# Altium PCB LEDFLX.PcbDoc (part 2 of 2)
Units mil, origin at the board's own origin, x right, y up, seen from the top; angles counter-clockwise.
Board outline 11984.7 x 6871.18 mil, 2 copper layers (Top Layer, Bottom Layer); 47 components, 41 nets, 211 pads, 221 vias.
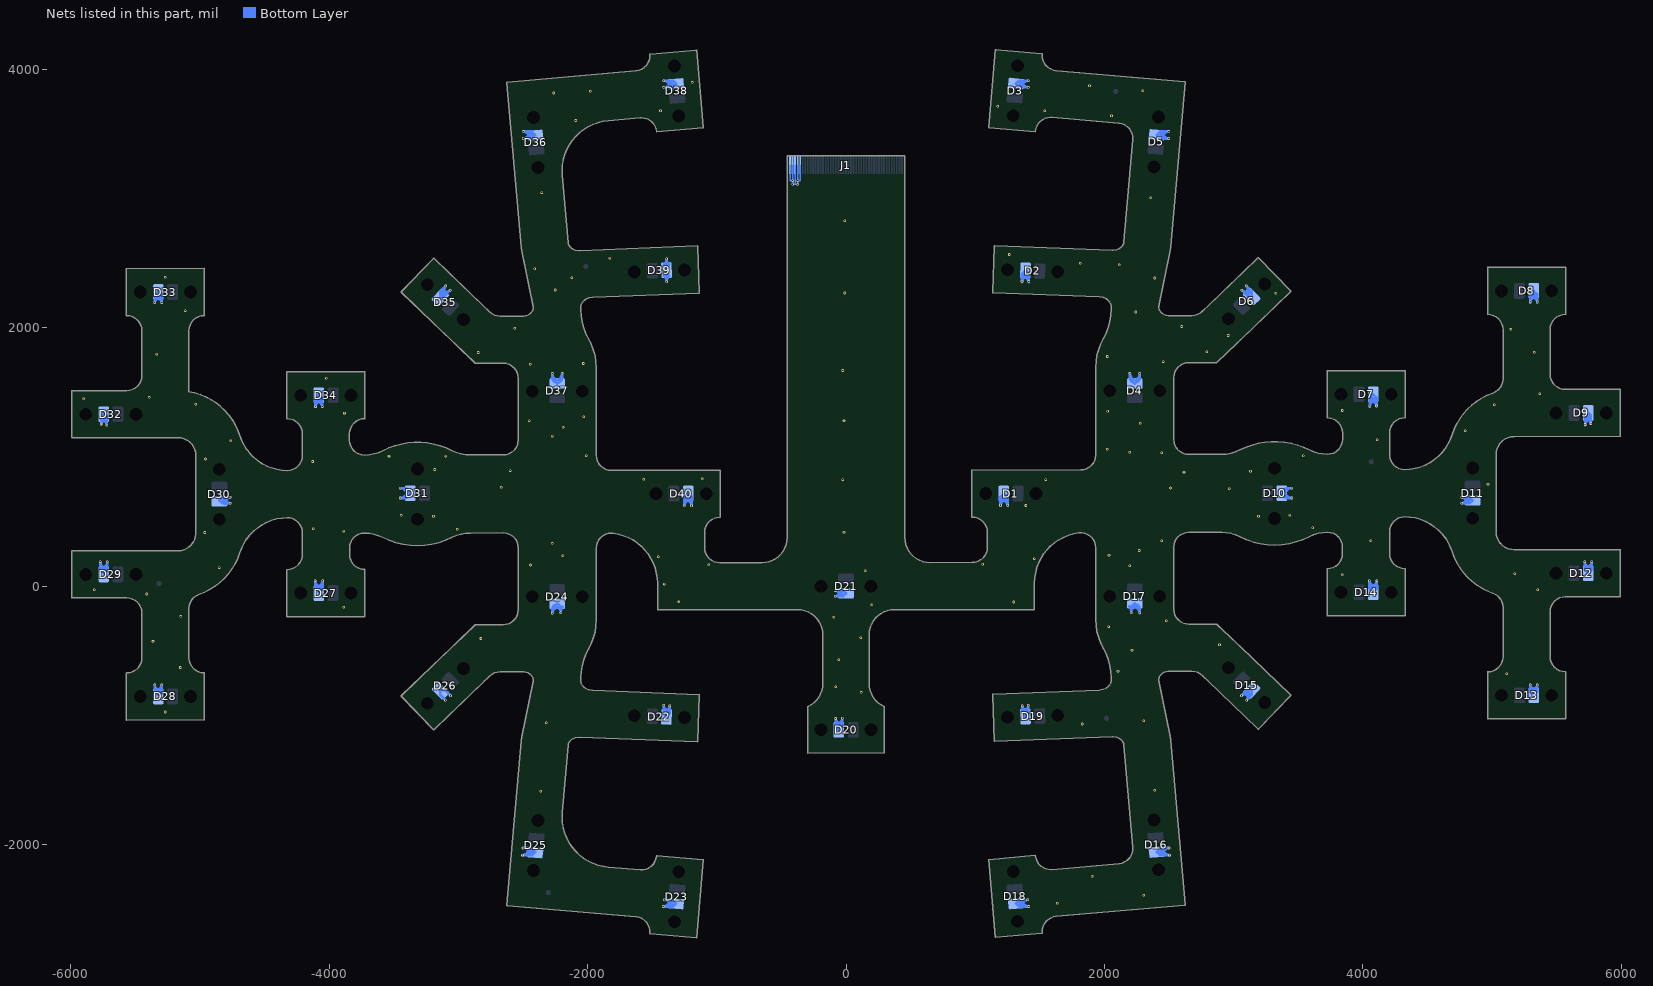
[diagram p2: the nets of this part, all layers, seen from the top]

## Via types
v1: diameter 20, hole 10, Top Layer to Bottom Layer, 221 vias

## Nets (pads, with @x,y where several pads share a name; then routed paths per layer and width w, separated by ;. In a path a pad name is that pad's centre, name@x,y a point inside that pad or via, vN(x,y) a via of type N, cw(c..) or ccw(c..) an arc to the next point about the centre after c; other vN are vias at no path point) (continued)
VCC: D1.1 D2.1 D3.1 D4.1 D5.1 D6.1 D7.1 D8.1 D9.1 D10.1 D11.1 D12.1 D13.1 D14.1 D15.1 D16.1 D17.1 D18.1 D19.1 D20.1 D21.1 D22.1 D23.1 D24.1 D25.1 D26.1 D27.1 D28.1 D29.1 D30.1 D31.1 D32.1 D33.1 D34.1 D35.1 D36.1 D37.1 D38.1 D39.1 D40.1 J1.41 J1.42 J1.43 J1.44 J1.45 | length 21223.7
  Bottom Layer w12: J1.45@-433.07,3258.66 -433.07,3139.05 -432.6,3138.59 -413.07,3138.59 -413.07,3111.65 -393.7,3111.65 ; v1(-413.39,3138.9) J1.44@-413.39,3258.66 ; J1.43@-393.7,3258.66 -393.7,3111.65 ; v1(-374.02,3138.9) J1.42@-374.02,3258.66 ; J1.41@-354.41,3258.66 -354.33,3138.07 -373.19,3138.07 -373.19,3111.65 -393.7,3111.65 ; -423.8,3138.59 ccw(c-423.8,3149.31) v1@-416.21,3141.73 ; -423.8,3138.59 ccw(c-423.8,3149.31) v1@-416.21,3141.73 ; -423.8,3138.59 ccw(c-423.8,3149.31) v1@-416.21,3141.73 ; v1@-416.21,3136.07 cw(c-423.8,3128.49) -413.07,3128.49 ; v1@-416.21,3136.07 cw(c-423.8,3128.49) -413.07,3128.49 ; v1@-416.21,3136.07 cw(c-423.8,3128.49) -413.07,3128.49 ; v1@-416.14,3113.26 ccw(c-423.53,3120.66) -413.07,3120.66 ; v1@-416.14,3113.26 ccw(c-423.53,3120.66) -413.07,3120.66 ; v1@-416.14,3113.26 ccw(c-423.53,3120.66) -413.07,3120.66 ; v1@-410.48,3107.6 cw(c-400.71,3097.83) -400.71,3111.65 ; v1@-410.48,3107.6 cw(c-400.71,3097.83) -400.71,3111.65 ; v1@-410.48,3107.6 cw(c-400.71,3097.83) -400.71,3111.65 ; -386.54,3111.65 cw(c-386.54,3097.83) v1@-376.77,3107.6 ; -386.54,3111.65 cw(c-386.54,3097.83) v1@-376.77,3107.6 ; -386.54,3111.65 cw(c-386.54,3097.83) v1@-376.77,3107.6 ; v1@-376.84,3136.07 cw(c-385.67,3127.24) -373.19,3127.24 ; v1@-376.84,3136.07 cw(c-385.67,3127.24) -373.19,3127.24 ; v1@-376.84,3136.07 cw(c-385.67,3127.24) -373.19,3127.24 ; v1@-376.77,3113.26 ccw(c-385.4,3121.9) -373.19,3121.9 ; v1@-376.77,3113.26 ccw(c-385.4,3121.9) -373.19,3121.9 ; v1@-376.77,3113.26 ccw(c-385.4,3121.9) -373.19,3121.9 ; v1@-371.19,3141.73 ccw(c-362.36,3150.55) -362.36,3138.07 ; v1@-371.19,3141.73 ccw(c-362.36,3150.55) -362.36,3138.07 ; v1@-371.19,3141.73 ccw(c-362.36,3150.55) -362.36,3138.07
  Bottom Layer w20: -5772.64,163 ccw(c-5729.45,163) D29.1@-5741.98,121.67 ; v1(-5765.75,1255.01) cw(c-5740.9,1255.01) D32.1@-5742.85,1279.78 ; v1@-5765.75,1258.86 -5765.75,1319.92 -5745.32,1340.35 -5720.47,1315.51 v1@-5720.47,1250.98 ; D29.1@-5753.86,140.99 ccw(c-5767.38,188.97) v1(-5717.52,188.98) -5717.52,128.27 -5745.32,100.47 -5772.64,127.8 v1(-5772.64,189.96) ccw(c-5721.28,189.96) D29.1@-5736.18,140.81 ; D32.1@-5749.85,1280.01 cw(c-5754.78,1246.06) v1(-5720.47,1246.06) ; D29.1@-5748.43,121.73 ccw(c-5759.94,162.56) -5717.52,162.56 ; D32.1@-5746.97,1299.8 cw(c-5751.42,1269.18) -5720.47,1269.18 ; -5351.38,-787.92 ccw(c-5315.97,-787.92) D28.1@-5321.12,-822.96 ; v1(-5351.38,2193.05) cw(c-5318.92,2193.05) D33.1@-5320.88,2225.45 ; v1@-5351.38,2199.8 -5351.38,2256.77 -5322.8,2285.35 -5296.26,2258.82 v1@-5296.26,2200.79 ; -5351.38,2214.3 cw(c-5320.21,2214.3) D33.1@-5322.1,2245.41 ; D28.1@-5328.96,-803.44 ccw(c-5336.69,-764.77) v1(-5297.24,-764.76) -5297.24,-819.68 -5322.8,-845.24 -5351.38,-816.65 v1(-5351.38,-764.76) ccw(c-5312.56,-764.77) D28.1@-5318.21,-803.17 ; D28.1@-5325.05,-823.06 ccw(c-5331.82,-789.15) -5297.24,-789.15 ; D33.1@-5324.91,2225.46 cw(c-5326.96,2194.83) v1(-5296.26,2194.83) ; D33.1@-5323.57,2245.42 cw(c-5325.53,2216.22) D33.1@-5296.26,2216.22 ; D30.1@-4819.02,656.38 cw(c-4787.98,655.97) -4787.98,687.01 ; D30.1@-4808.24,634.26 cw(c-4790.21,616.24) D30.1@-4790.21,641.73 ; D30.1@-4800.57,666.29 ccw(c-4766.73,677.31) v1(-4766.73,641.73) -4827.32,641.73 -4850.2,664.61 -4827.8,687.01 v1(-4767.72,687.01) ccw(c-4767.72,655.7) D30.1@-4799.02,656.12 ; -4109.25,17.7 ccw(c-4067.61,17.7) D27.1@-4077.69,-22.7 ; v1(-4106.3,1389.66) cw(c-4067.79,1389.66) D34.1@-4074.77,1427.53 ; v1@-4106.3,1394.69 -4106.3,1459.09 -4080.47,1484.92 -4054.13,1458.58 v1@-4054.13,1393.7 ; -4106.3,1413.68 cw(c-4072.22,1413.68) D34.1@-4078.39,1447.2 ; D27.1@-4087.46,-3.15 ccw(c-4097.81,42.32) v1(-4051.18,42.32) -4051.18,-17.56 -4080.47,-46.85 -4109.25,-18.07 v1(-4109.25,43.31) ccw(c-4061.22,43.3) D27.1@-4072.85,-3.3 ; D34.1@-4086.39,1427.57 cw(c-4093.86,1388.55) v1@-4054.13,1388.55 ; D27.1@-4083.02,-22.65 ccw(c-4092.11,17.26) -4051.18,17.26 ; D34.1@-4082.63,1447.21 cw(c-4089.23,1412.74) -4054.13,1412.74 ; -3420.79,758.86 cw(c-3420.79,717.98) D31.1@-3383.05,733.69 ; -3418.24,682.09 ccw(c-3418.24,721.93) D31.1@-3382.7,703.93 ; D31.1@-3401.52,726 ccw(c-3450.79,705.49) v1(-3450.79,758.86) -3412.87,758.86 D31.1@-3372.44,718.43 -3408.78,682.09 v1(-3450.79,682.09) ccw(c-3450.78,738.4) D31.1@-3400.54,712.97 ; D35.1@-3122.11,2261.37 ccw(c-3109.48,2292.95) -3085.43,2268.9 ; D35.1@-3117.2,2257.61 cw(c-3086.73,2280.57) -3113.71,2307.55 ; D35.1@-3114.69,2279.94 ccw(c-3097.23,2323.61) v1(-3063.98,2290.35) -3112.67,2241.66 -3140.02,2241.66 -3140.02,2281.24 v1(-3097.44,2323.82) ccw(c-3068.18,2294.56) D35.1@-3101.23,2269.65 ; v1@-3100.39,-882.87 -3100.39,-881.89 -3140.02,-842.27 -3140.02,-805.16 -3103.3,-805.16 v1(-3061.02,-847.44) ; -2477.06,-2026.57 cw(c-2477.06,-2067.15) D25.1@-2436.86,-2061.63 ; -2475.28,3519.69 cw(c-2475.28,3480.96) D36.1@-2436.87,3485.92 ; -2474.39,-2081.69 ccw(c-2474.39,-2040.5) D25.1@-2436.14,-2055.8 ; -2471.31,3464.57 ccw(c-2471.31,3500.85) D36.1@-2436.5,3490.63 ; D36.1@-2456.71,3483.35 ccw(c-2498.03,3478.02) v1(-2498.03,3519.69) -2432.44,3519.69 -2405.86,3493.1 -2434.39,3464.57 v1(-2498.03,3464.57) ccw(c-2498.03,3508.69) D36.1@-2455.69,3496.26 ; D25.1@-2456.67,-2064.35 ccw(c-2500,-2070.31) v1(-2500,-2026.57) -2437.03,-2026.57 -2405.86,-2057.75 -2429.8,-2081.69 v1(-2503.94,-2081.69) ccw(c-2503.93,-2028.68) D25.1@-2454.71,-2048.37 ; D25.1@-2454.12,-2026.57 cw(c-2454.12,-2064) D25.1@-2417.05,-2058.91 ; D36.1@-2452.53,3519.69 cw(c-2452.53,3483.89) D36.1@-2417.04,3488.48 ; -2273.62,1615.66 ccw(c-2232.89,1615.66) D37.1@-2249.67,1578.55 ; v1(-2273.62,1646.65) ccw(c-2218.88,1646.65) D37.1@-2241.43,1596.77 ; v1(-2273.62,1646.65) -2273.62,1606.97 D37.1@-2234.72,1568.07 -2197.83,1604.96 v1(-2197.83,1646.65) ; v1(-2272.64,-209.03) cw(c-2226.72,-209.03) D24.1@-2243.14,-166.14 ; v1@-2272.64,-206.69 -2272.64,-170.94 -2234.72,-133.03 -2206.69,-161.06 v1(-2206.69,-205.71) ; -2272.64,-179.95 cw(c-2237.86,-179.95) D24.1@-2250.3,-147.47 ; D24.1@-2230.95,-163.92 cw(c-2255.69,-206.21) v1@-2206.69,-206.21 ; D37.1@-2229.05,1596.28 ccw(c-2254.08,1646.65) v1(-2197.83,1646.65) ; D37.1@-2220.15,1578.37 ccw(c-2238.05,1614.38) -2197.83,1614.38 ; -2206.69,-192.62 cw(c-2159.15,-192.62) D24.1@-2192.77,-159 ; -1411.42,-947.15 ccw(c-1376.27,-947.15) D22.1@-1385.15,-981.16 ; D39.1@-1409.64,2403.45 cw(c-1454.97,2355.27) v1@-1388.82,2355.27 ; D39.1@-1409.45,2490.17 ccw(c-1444.65,2533.5) v1(-1388.82,2533.51) ; D22.1@-1393.57,-961.28 ccw(c-1399.82,-926.18) v1(-1364.17,-926.18) -1364.17,-984.91 -1388.82,-1009.56 -1411.42,-986.96 v1(-1411.42,-921.26) ccw(c-1369.51,-921.26) D22.1@-1380.09,-961.81 ; D22.1@-1390.07,-980.97 ccw(c-1395.57,-950.06) -1364.17,-950.06 ; v1(-1388.78,2355.31) v1@-1388.82,2355.27 ; -1385.88,-2479.33 ccw(c-1385.88,-2436.77) D23.1@-1346.33,-2452.49 ; -1385.3,3912.4 cw(c-1385.3,3872.46) D38.1@-1346.74,3882.87 ; -1384.89,3860.24 ccw(c-1384.89,3899.96) D38.1@-1346.7,3889.03 ; -1383.95,-2427.17 cw(c-1383.95,-2464.61) D23.1@-1346.99,-2458.58 ; D39.1@-1368.83,2489.41 cw(c-1330.2,2533.5) v1(-1388.82,2533.51) ; D39.1@-1367.31,2402.68 ccw(c-1325.82,2355.27) v1@-1388.82,2355.27 ; D23.1@-1366.73,-2461.8 ccw(c-1407.48,-2468.45) v1(-1407.48,-2427.17) -1345.11,-2427.17 -1316.03,-2456.25 -1339.12,-2479.33 v1(-1415.35,-2479.33) ccw(c-1415.35,-2425.06) D23.1@-1364.91,-2445.1 ; D38.1@-1366.05,3877.66 ccw(c-1411.41,3865.42) v1(-1411.41,3912.4) -1338.65,3912.4 -1316.03,3889.79 -1345.59,3860.24 v1(-1411.41,3860.24) ccw(c-1411.41,3907.55) D38.1@-1365.92,3894.53 ; v1@-1250.98,626.97 -1250.98,687.05 D40.1@-1221.3,716.73 -1195.87,691.3 v1@-1195.87,626.97 ; D21.1@-60.02,-77.76 ccw(c-60.02,-48.35) D21.1@-31.02,-53.22 ; D21.1@-58.52,-34.45 cw(c-58.52,-62.48) D21.1@-30.98,-57.26 ; D21.1@-50.75,-49.91 cw(c-83.66,-44.38) v1(-83.66,-77.76) -22.64,-77.76 D21.1@0,-55.12 -20.67,-34.45 v1(-82.68,-34.45) cw(c-82.67,-67.07) D21.1@-50.63,-60.99 ; v1(1195.87,626.97) 1195.87,691.3 D1.1@1221.3,716.73 1250.98,687.05 v1(1250.98,626.97) ; v1@1362.2,2354.26 cw(c1401.34,2354.26) D2.1@1393.98,2392.69 ; v1(1362.2,2359.25) 1362.2,2416.68 D2.1@1388.82,2443.3 1413.39,2418.73 v1(1413.39,2358.27) ; 1362.2,2378.45 cw(c1396.7,2378.45) D2.1@1390.21,2412.34 ; D2.1@1381.54,2392.81 cw(c1373.24,2353.53) v1@1413.39,2353.53 ; D2.1@1385.68,2412.38 cw(c1378.45,2378.2) 1413.39,2378.2 ; v1(2197.83,1646.65) 2197.83,1604.96 D4.1@2234.72,1568.07 2273.62,1606.97 v1(2273.62,1646.65) ; v1(2206.69,-205.71) 2206.69,-161.06 D17.1@2234.72,-133.03 2272.64,-170.94 v1(2272.64,-206.69) ; v1(3100.39,-882.87) v1@3100.39,-881.89 ; v1(4054.13,1393.7) 4054.13,1458.58 D7.1@4080.47,1484.92 4106.3,1459.09 v1(4106.3,1394.69) ; v1(5296.26,2200.79) 5296.26,2258.82 D8.1@5322.8,2285.35 5351.38,2256.77 v1(5351.38,2199.8) ; v1(5720.47,1250.98) 5720.47,1315.51 D9.1@5745.32,1340.35 5765.75,1319.92 v1(5765.75,1258.86) ; v1@-1388.82,2355.27 v1(-1388.82,2533.51) ; v1(-80.71,-1024.61) ccw(c-43.78,-1024.61) -49.9,-1061.03 cw(c-43.78,-1024.61) v1(-80.71,-1024.61) ; v1(-80.71,-1024.61) -80.71,-1086.18 D20.1@-55.12,-1111.77 -27.56,-1084.21 v1(-27.56,-1023.62) ; v1@-27.56,-1023.62 cw(c-65.28,-1023.62) -59.74,-1060.93 ccw(c-65.28,-1023.62) v1@-27.56,-1023.62 ; v1(1364.17,-926.18) ccw(c1397.01,-926.18) 1392.44,-958.7 cw(c1397.01,-926.18) v1(1364.17,-926.18) ; v1(1364.17,-926.18) 1364.17,-984.91 D19.1@1388.82,-1009.56 1411.42,-986.96 v1(1411.42,-921.26) ; v1(1407.48,-2427.17) ccw(c1407.48,-2468.93) 1366.52,-2460.72 cw(c1407.48,-2468.93) v1(1407.48,-2427.17) ; v1(1407.48,-2427.17) 1345.11,-2427.17 D18.1@1316.03,-2456.25 1339.12,-2479.33 v1(1415.35,-2479.33) ; v1(1411.42,-921.26) cw(c1372.56,-921.26) 1381.12,-959.16 ccw(c1372.56,-921.26) v1(1411.42,-921.26) ; v1(1411.42,3860.24) cw(c1411.42,3906.79) 1366.22,3895.62 ccw(c1411.42,3906.79) v1(1411.42,3860.24) ; v1(1411.42,3860.24) 1345.59,3860.24 D3.1@1316.03,3889.79 1338.65,3912.4 v1(1411.42,3912.4) ; v1(1411.42,3912.4) ccw(c1411.41,3864.56) 1365.73,3878.74 cw(c1411.41,3864.56) v1(1411.42,3912.4) ; v1(1415.35,-2479.33) cw(c1415.35,-2426.25) 1365.33,-2444 ccw(c1415.35,-2426.25) v1(1415.35,-2479.33) ; v1(2498.03,3464.57) cw(c2498.03,3507.37) 2456.23,3498.17 ccw(c2498.03,3507.37) v1(2498.03,3464.57) ; v1(2498.03,3464.57) 2434.39,3464.57 D5.1@2405.86,3493.1 2432.44,3519.69 v1(2498.03,3519.69) ; v1(2498.03,3519.69) ccw(c2498.03,3477.26) 2456.38,3485.38 cw(c2498.03,3477.26) v1(2498.03,3519.69) ; v1(2500,-2026.57) ccw(c2500,-2071.11) 2456.34,-2062.29 cw(c2500,-2071.11) v1(2500,-2026.57) ; v1(2500,-2026.57) 2437.03,-2026.57 D16.1@2405.86,-2057.75 2429.8,-2081.69 v1(2503.94,-2081.69) ; v1(2503.94,-2081.69) cw(c2503.93,-2030.75) 2455.45,-2046.38 ccw(c2503.93,-2030.75) v1(2503.94,-2081.69) ; v1(3061.02,-847.44) cw(c3085.89,-872.3) D15.1@3107.25,-844.37 ; v1(3061.02,-847.44) cw(c3085.89,-872.3) D15.1@3107.25,-844.37 ; v1(3061.02,-847.44) cw(c3085.89,-872.3) D15.1@3107.25,-844.37 ; v1(3061.02,-847.44) 3103.3,-805.16 D15.1@3140.02,-805.16 3140.02,-842.27 v1@3100.39,-881.89 ; v1(3063.98,2290.35) ccw(c3092.22,2318.6) 3111.32,2283.51 cw(c3092.22,2318.6) v1(3063.98,2290.35) ; v1(3063.98,2290.35) 3112.67,2241.66 D6.1@3140.02,2241.66 3140.02,2281.24 v1(3097.44,2323.82) ; 3077.18,-831.29 cw(c3099.89,-854) D15.1@3119.39,-828.49 ; 3077.18,-831.29 cw(c3099.89,-854) D15.1@3119.39,-828.49 ; 3077.18,-831.29 cw(c3099.89,-854) D15.1@3119.39,-828.49 ; v1(3097.44,2323.82) cw(c3070.73,2297.11) 3101.08,2274.61 ccw(c3070.73,2297.11) v1(3097.44,2323.82) ; v1@3100.39,-881.89 ccw(c3078.24,-859.73) 3102.25,-839.59 cw(c3078.24,-859.73) v1@3100.39,-881.89 ; v1(3450.79,682.09) cw(c3450.79,738.4) 3400.54,712.97 ccw(c3450.79,738.4) v1(3450.79,682.09) ; v1(3450.79,682.09) 3408.78,682.09 D10.1@3372.44,718.43 3412.87,758.86 v1(3450.79,758.86) ; v1(3450.79,758.86) ccw(c3450.79,705.49) 3401.52,726 cw(c3450.79,705.49) v1(3450.79,758.86) ; v1(4051.18,42.32) ccw(c4089.79,42.32) 4084.66,4.05 cw(c4089.79,42.32) v1(4051.18,42.32) ; v1(4051.18,42.32) 4051.18,-17.56 D14.1@4080.47,-46.85 4109.25,-18.07 v1(4109.25,43.31) ; v1(4109.25,43.31) cw(c4069.42,43.3) 4075.59,3.95 ccw(c4069.42,43.3) v1(4109.25,43.31) ; v1(4766.73,641.73) ccw(c4766.73,674.83) 4799.41,669.59 cw(c4766.73,674.83) v1(4766.73,641.73) ; v1(4766.73,641.73) 4827.32,641.73 D11.1@4850.2,664.61 4827.8,687.01 v1(4767.72,687.01) ; v1(4767.72,687.01) cw(c4767.72,654.98) 4799.38,659.83 ccw(c4767.72,654.98) v1(4767.72,687.01) ; v1(5297.24,-764.76) ccw(c5326.66,-764.77) 5324.79,-794.12 cw(c5326.66,-764.77) v1(5297.24,-764.76) ; v1(5297.24,-764.76) 5297.24,-819.68 D13.1@5322.8,-845.24 5351.38,-816.65 v1(5351.38,-764.76) ; v1(5351.38,-764.76) cw(c5322.08,-764.77) 5322.43,-794.06 ccw(c5322.08,-764.77) v1(5351.38,-764.76) ; v1(5717.52,188.98) ccw(c5755.61,188.97) 5749.97,151.31 cw(c5755.61,188.97) v1(5717.52,188.98) ; v1(5717.52,188.98) 5717.52,128.27 D12.1@5745.32,100.47 5772.64,127.8 v1(5772.64,189.96) ; v1(5772.64,189.96) cw(c5733.31,189.96) 5739.98,151.2 ccw(c5733.31,189.96) v1(5772.64,189.96) ; v1(-1250.98,620.94) cw(c-1204.56,620.94) -1214.53,666.29 ccw(c-1204.56,620.94) v1(-1250.98,620.94) ; -1250.98,645.82 cw(c-1210.03,645.82) -1218.83,685.82 ccw(c-1210.03,645.82) -1250.98,645.82 ; D40.1@-1229.59,666.66 cw(c-1241.65,622.5) v1(-1195.87,622.5) ccw(c-1241.65,622.5) D40.1@-1229.59,666.66 ; D40.1@-1224.33,685.96 cw(c-1234.5,648.69) -1195.87,648.69 ccw(c-1234.5,648.69) D40.1@-1224.33,685.96 ; -80.71,-1048.25 ccw(c-47.75,-1048.25) -53.21,-1080.75 cw(c-47.75,-1048.25) -80.71,-1048.25 ; D20.1@-56.81,-1080.72 ccw(c-61.84,-1046.81) -27.56,-1046.81 cw(c-61.84,-1046.81) D20.1@-56.81,-1080.72 ; v1@1195.87,622.5 cw(c1241.65,622.5) 1229.59,666.66 ccw(c1241.65,622.5) v1@1195.87,622.5 ; 1195.87,648.69 cw(c1234.5,648.69) 1224.33,685.96 ccw(c1234.5,648.69) 1195.87,648.69 ; D1.1@1214.53,666.29 cw(c1204.56,620.94) 1250.98,620.94 ccw(c1204.56,620.94) D1.1@1214.53,666.29 ; D1.1@1218.83,685.82 cw(c1210.03,645.82) 1250.98,645.82 ccw(c1210.03,645.82) D1.1@1218.83,685.82 ; D18.1@1346.48,-2450.68 ccw(c1387.04,-2436.3) 1387.04,-2479.33 cw(c1387.04,-2436.3) D18.1@1346.48,-2450.68 ; D3.1@1346.62,3884.66 cw(c1384.27,3872.99) 1384.27,3912.4 ccw(c1384.27,3872.99) D3.1@1346.62,3884.66 ; D3.1@1346.8,3890.83 ccw(c1385.87,3900.48) 1385.87,3860.24 cw(c1385.87,3900.48) D3.1@1346.8,3890.83 ; D18.1@1346.92,-2456.79 cw(c1383.07,-2464.04) 1383.07,-2427.17 ccw(c1383.07,-2464.04) D18.1@1346.92,-2456.79 ; 1364.17,-949.19 ccw(c1393.77,-949.19) 1389.65,-978.5 cw(c1393.77,-949.19) 1364.17,-949.19 ; D19.1@1385.52,-978.67 ccw(c1378.21,-946.28) 1411.42,-946.28 cw(c1378.21,-946.28) D19.1@1385.52,-978.67 ; D17.1@2192.77,-155.3 cw(c2159.15,-188.92) 2206.69,-188.92 ccw(c2159.15,-188.92) D17.1@2192.77,-155.3 ; 2197.83,1614.38 ccw(c2238.05,1614.38) 2220.15,1578.37 cw(c2238.05,1614.38) 2197.83,1614.38 ; v1(2197.83,1646.65) ccw(c2254.08,1646.65) 2229.05,1596.28 cw(c2254.08,1646.65) v1(2197.83,1646.65) ; v1@2206.69,-206.18 cw(c2262.27,-206.18) 2232.12,-159.49 ccw(c2262.27,-206.18) v1@2206.69,-206.18 ; D4.1@2241.43,1596.77 ccw(c2218.88,1646.65) v1(2273.62,1646.65) cw(c2218.88,1646.65) D4.1@2241.43,1596.77 ; D17.1@2241.84,-161.91 cw(c2221.37,-208.91) 2272.64,-208.91 ccw(c2221.37,-208.91) D17.1@2241.84,-161.91 ; D4.1@2249.67,1578.55 ccw(c2232.89,1615.66) 2273.62,1615.66 cw(c2232.89,1615.66) D4.1@2249.67,1578.55 ; D17.1@2249.82,-143.57 cw(c2234.66,-178.39) 2272.64,-178.39 ccw(c2234.66,-178.39) D17.1@2249.82,-143.57 ; D16.1@2436.41,-2052.52 ccw(c2476.47,-2039.6) 2476.47,-2081.69 cw(c2476.47,-2039.6) D16.1@2436.41,-2052.52 ; D5.1@2436.7,3493.87 ccw(c2473.15,3501.89) 2473.15,3464.57 cw(c2473.15,3501.89) D5.1@2436.7,3493.87 ; D16.1@2436.74,-2058.33 cw(c2475.55,-2066.17) 2475.55,-2026.57 ccw(c2475.55,-2066.17) D16.1@2436.74,-2058.33 ; D5.1@2436.75,3489.2 cw(c2473.75,3481.99) 2473.75,3519.68 ccw(c2473.75,3481.99) D5.1@2436.75,3489.2 ; D6.1@3082.9,2271.43 ccw(c3105.56,2294.1) 3120.88,2265.95 cw(c3105.56,2294.1) D6.1@3082.9,2271.43 ; 3113.84,2307.42 cw(c3089.56,2283.14) 3117.14,2262.7 ccw(c3089.56,2283.14) 3113.84,2307.42 ; D15.1@3115.83,-866.45 ccw(c3095.03,-845.65) 3117.57,-826.74 cw(c3095.03,-845.65) D15.1@3115.83,-866.45 ; D10.1@3382.7,703.93 ccw(c3418.24,721.93) 3418.24,682.09 cw(c3418.24,721.93) D10.1@3382.7,703.93 ; D10.1@3383.05,733.69 cw(c3420.79,717.98) 3420.79,758.86 ccw(c3420.79,717.98) D10.1@3383.05,733.69 ; 4051.18,19.46 ccw(c4086.73,19.46) 4082,-15.77 cw(c4086.73,19.46) 4051.18,19.46 ; v1@4054.13,1389.01 cw(c4101.79,1389.01) 4088.96,1434.9 ccw(c4101.79,1389.01) v1@4054.13,1389.01 ; 4054.13,1415.37 cw(c4094.42,1415.37) 4083.57,1454.17 ccw(c4094.42,1415.37) 4054.13,1415.37 ; D7.1@4072.16,1434.86 cw(c4059.9,1390.11) 4106.3,1390.11 ccw(c4059.9,1390.11) D7.1@4072.16,1434.86 ; D7.1@4077.44,1454.15 cw(c4067.08,1416.32) 4106.3,1416.32 ccw(c4067.08,1416.32) D7.1@4077.44,1454.15 ; D14.1@4078.69,-15.81 ccw(c4073.08,19.92) 4109.25,19.92 cw(c4073.08,19.92) D14.1@4078.69,-15.81 ; D11.1@4790.2,641.73 ccw(c4790.2,671.07) 4819.16,666.43 cw(c4790.2,671.07) D11.1@4790.2,641.73 ; D11.1@4791.02,687.01 cw(c4791.02,658.55) 4819.15,662.86 ccw(c4791.02,658.55) D11.1@4791.02,687.01 ; v1@5296.26,2195.57 cw(c5336.11,2195.57) 5328.67,2234.73 ccw(c5336.11,2195.57) v1@5296.26,2195.57 ; 5296.26,2219.73 cw(c5331.52,2219.73) 5324.94,2254.38 ccw(c5331.52,2219.73) 5296.26,2219.73 ; D13.1@5297.24,-786.08 ccw(c5325.3,-786.08) 5323.52,-814.08 cw(c5325.3,-786.08) D13.1@5297.24,-786.08 ; D8.1@5317.24,2234.67 cw(c5309.93,2193.87) 5351.38,2193.87 ccw(c5309.93,2193.87) D8.1@5317.24,2234.67 ; D8.1@5320.77,2254.35 cw(c5314.21,2217.77) 5351.38,2217.77 ccw(c5314.21,2217.77) D8.1@5320.77,2254.35 ; D13.1@5322.66,-814.06 ccw(c5322.32,-785) 5351.38,-785 cw(c5322.32,-785) D13.1@5322.66,-814.06 ; 5717.52,165.76 ccw(c5752.13,165.76) 5747.02,131.53 cw(c5752.13,165.76) 5717.52,165.76 ; v1@5720.47,1246.69 cw(c5765.72,1246.69) 5753.69,1290.31 ccw(c5765.72,1246.69) v1@5720.47,1246.69 ; 5720.47,1272.95 cw(c5758.47,1272.95) 5748.37,1309.59 ccw(c5758.47,1272.95) 5720.47,1272.95 ; D9.1@5738.31,1289.96 cw(c5730.47,1255.57) 5765.75,1255.57 ccw(c5730.47,1255.57) D9.1@5738.31,1289.96 ; D9.1@5742.76,1309.46 cw(c5736.19,1280.64) 5765.75,1280.64 ccw(c5736.19,1280.64) D9.1@5742.76,1309.46 ; D12.1@5743.37,131.49 ccw(c5737.39,166.22) 5772.64,166.22 cw(c5737.39,166.22) D12.1@5743.37,131.49
  other v1: 1634.84,-2453.74 2305.12,-2391.73 1904.53,-2246.06 -2363.19,-1586.61 2388.78,-1579.72 1828.74,-1066.93 -2319.88,-1057.09 2305.12,-1041.34 -5268.7,-974.41 -3100.39,-882.38 119.09,-822.83 -79.72,-778.37 5115.16,-677.17 2105.32,-658.08 -5151.57,-629.92 -57.09,-570.87 2213.58,-497.05 2890.75,-452.76 -5364.17,-428.09 -2825.79,-405.51 113.19,-399.61 2032.48,-312.99 2478.35,-268.7 -93.5,-240.16 -5148.62,-234.25 -3887.8,-164.37 200.79,-144.68 1299.21,-123.03 -1293.31,-122.05 -5411.42,-61.02 -5817.91,-27.56 5354.33,-27.56 -1405.51,15.75 3839.96,86.61 5175.2,96.46 147.64,119.09 -4851.38,143.7 2195.87,157.48 -2441.93,163.39 -1062.01,164.37 1057.09,168.31 1458.66,213.58 -1453.74,227.36 -2190.94,234.25 2035.43,239.17 2270.67,275.59 -2273.62,330.71 4062.99,350.39 2444.88,351.38 -4963.11,415.35 -15.75,417.75 -3887.8,426.18 -3007.87,440.02 -4123.03,443.9 3611.15,451.77 -3192.91,541.34 3192.91,541.34 -3441.93,547.24 3434.06,550.2 1392.72,624.02 2965.55,754.92 2511.81,759.84 -2668.31,765.75 4969.49,788.39 -25.59,824.8 1545.28,824.8 -1564.96,827.76 -1113.19,829.72 2616.14,882.87 3130.91,888.78 -2598.43,894.69 -3184.06,902.56 -4128.94,964.57 -4957.68,984.25 -3537.4,1006.89 -3097.44,1006.89 -2009.84,1009.84 3540.35,1009.84 2444.88,1031.5 2195.87,1036.42 2021.65,1060.04 -4761.81,1124.02 4112.2,1132.87 -2272.64,1161.42 4792.32,1202.76 -2189.96,1230.31 2277.56,1260.83 -15.75,1278.54 -2452.76,1281.5 -2029.53,1312.01 -3881.89,1339.57 2024.61,1354.25 3842.52,1359.25 -4054.13,1389.76 5016.73,1404.53 -5033.46,1407.48 -5899.61,1448.82 -5392.64,1460.63 5370.08,1488.19 -4021.65,1609.25 -25.59,1669.29 -2444.88,1718.5 -2032.48,1723.43 2455.71,1738.19 2023.65,1777.56 -5335.63,1796.26 -2845.47,1808.07 5327.76,1811.02 2792.32,1813.98 2957.68,1939.96 5146.45,1987.2 -2564.96,1996.06 2598.43,2009.84 2243.11,2122.05 -5115.16,2132.87 3327.76,2267.72 -8.86,2268.7 -2250.98,2292.32 2388.78,2384.84 -2122.05,2387.8 -5269.68,2390.71 -2410.43,2457.68 2114.17,2486.22 1813.98,2500 -1827.76,2539.37 1264.76,2566.93 -8.86,2828.04 2360.24,3006.89 -2355.32,3046.26 -413.31,3110.43 -373.94,3110.43 -2091.54,3604.33 2055.12,3640.75 -1436.02,3679.13 1539.37,3679.13 1175.2,3713.58 -2262.8,3816.93 -1979.33,3830.71 2298.23,3834.05 1884.67,3873.03 -1188.98,3898.62
pads on no net: FD1.1 FD2.1 FD3.1 FD4.1 FD5.1 FD6.1

## Polygon pours and split planes (outlines as drawn)
VCC on Top Layer "TopVcc" (solid, remove dead copper, pour order 2): 1917 vertices, not listed, extent -5992.35,-2719.92 5992.35,4151.26
VCC on Bottom Layer "BottomPlane" (hatched 45Degree grid 20 track 8, remove dead copper, pour order 6): 1702 vertices, not listed, extent -5992.35,-2719.92 5992.35,4151.26

## Keep-outs
Keep-Out Layer:
  lines w5: -4324.97,1298.27 -4301.59,1295.99 -4279.11,1289.19 -4258.39,1278.14 -4240.23,1263.26 -4225.32,1245.12 -4214.24,1224.42 -4207.42,1201.96 -4205.12,1178.59 -4205.1,1011.67 -4207.4,988.29 -4214.22,965.81 -4225.3,945.09 -4240.2,926.92 -4258.36,912.01 -4279.09,900.92 -4301.57,894.08 -4324.95,891.76 -4365.73,894.39 -4406.02,901.22 -4445.37,912.2 -4483.37,927.19 -4519.6,946.05 -4553.69,968.55 -4585.25,994.48 -4613.94,1023.53 -4639.47,1055.4 -4661.55,1089.75 -4679.95,1126.21 -4694.46,1164.38 -4710.38,1207.04 -4730.11,1248.08 -4753.49,1287.15 -4780.34,1323.93 -4810.42,1358.11 -4843.49,1389.42 -4879.28,1417.58 -4917.49,1442.37 -4957.79,1463.59 -4999.86,1481.04 -5043.35,1494.6 -5087.9,1504.15 -5087.9,1977.25 -5085.6,2000.62 -5078.78,2023.1 -5067.7,2043.82 -5052.8,2061.98 -5034.63,2076.9 -5013.91,2087.98 -4991.43,2094.82 -4968.05,2097.14 -4968.05,2456.52 -5567.32,2456.02 -5567.32,2096.64 -5543.93,2094.36 -5521.45,2087.56 -5500.73,2076.51 -5482.57,2061.63 -5467.66,2043.49 -5456.59,2022.78 -5449.77,2000.32 -5447.46,1976.95 -5447.46,1630.57 -5449.77,1607.19 -5456.59,1584.72 -5467.66,1564 -5482.57,1545.83 -5500.73,1530.92 -5521.45,1519.83 -5543.93,1512.99 -5567.32,1510.67 -5989.84,1510.32 -5989.84,1150.94 -5170.84,1151.63 -5146.38,1149.51 -5122.67,1143.18 -5100.42,1132.82 -5080.31,1118.77 -5062.95,1101.43 -5048.86,1081.34 -5038.49,1059.11 -5032.14,1035.41 -5030,1010.97 -5030,412 -5030.1,406.57 -5033.06,382.81 -5040,359.9 -5050.72,338.49 -5064.91,319.2 -5082.17,302.58 -5101.99,289.13 -5123.81,279.23 -5146.98,273.17 -5170.84,271.11 -5989.84,270.43 -5989.84,-88.95 -5567.32,-88.6 -5543.93,-90.88 -5521.45,-97.68 -5500.73,-108.73 -5482.57,-123.61 -5467.66,-141.75 -5456.59,-162.45 -5449.77,-184.92 -5447.46,-208.29 -5447.46,-554.67 -5449.77,-578.04 -5456.59,-600.52 -5467.66,-621.24 -5482.57,-639.41 -5500.73,-654.32 -5521.45,-665.41 -5543.93,-672.24 -5567.32,-674.56 -5567.32,-1033.94 -4968.05,-1033.44 -4968.05,-674.06 -4991.43,-671.78 -5013.91,-664.98 -5034.63,-653.93 -5052.8,-639.05 -5067.7,-620.91 -5078.78,-600.21 -5085.6,-577.74 -5087.9,-554.37 -5087.9,-173.92 -5085.36,-149.38 -5077.84,-125.88 -5065.67,-104.41 -5049.36,-85.88 -5029.6,-71.08 -5007.23,-60.64 -4964.18,-43.45 -4922.9,-22.35 -4883.75,2.48 -4847.06,30.81 -4813.14,62.42 -4782.3,97.02 -4754.79,134.33 -4730.85,174.02 -4710.68,215.74 -4694.46,259.15 -4679.95,297.35 -4661.55,333.84 -4639.46,368.23 -4613.93,400.15 -4585.23,429.25 -4553.66,455.23 -4519.57,477.79 -4483.33,496.71 -4445.33,511.76 -4405.97,522.8 -4365.68,529.7 -4324.89,532.38 -4301.51,530.1 -4279.03,523.3 -4258.31,512.25 -4240.15,497.37 -4225.24,479.23 -4214.16,458.54 -4207.34,436.07 -4205.04,412.7 -4205.02,245.78 -4207.32,222.41 -4214.14,199.93 -4225.22,179.21 -4240.12,161.04 -4258.28,146.12 -4279.01,135.04 -4301.49,128.2 -4324.88,125.88 -4324.98,125.88 -4324.98,-233.5 -3725.71,-233 -3725.71,126.38 -3749.08,128.68 -3771.54,135.49 -3792.24,146.54 -3810.39,161.43 -3825.28,179.56 -3836.34,200.25 -3843.16,222.7 -3845.46,246.06 -3845.46,294.96 -3843.2,317.98 -3836.48,340.13 -3825.57,360.55 -3810.88,378.45 -3792.99,393.14 -3772.57,404.07 -3750.42,410.8 -3727.38,413.09 -3690.47,410.94 -3654.08,404.48 -3618.69,393.8 -3584.81,379.06 -3534.2,356.32 -3481.68,338.43 -3427.71,325.56 -3372.76,317.8 -3317.32,315.24 -3261.88,317.89 -3206.93,325.74 -3152.96,338.71 -3100.44,356.68 -3049.83,379.5 -3015.93,394.31 -2980.52,405.05 -2944.1,411.57 -2907.17,413.77 -2652.27,413.98 -2629.24,411.74 -2607.09,405.04 -2586.67,394.15 -2568.78,379.49 -2554.09,361.61 -2543.18,341.22 -2536.46,319.08 -2534.19,296.06 -2534.19,98.1 -2534.45,-181.42 -2536.77,-204.78 -2543.6,-227.23 -2554.69,-247.94 -2569.59,-266.08 -2587.75,-280.98 -2608.46,-292.05 -2630.94,-298.88 -2654.3,-301.2 -2654.42,-301.2 -2868.3,-301.18 -3025.43,-450.89 -3051.64,-475.93 -3440.85,-850.61 -3191.53,-1109.35 -2799.85,-732.29 -2773.64,-707.26 -2759.4,-693.7 -2741.5,-679.62 -2721.26,-669.18 -2699.41,-662.76 -2676.74,-660.58 -2676.63,-660.58 -2496.51,-660.59 -2493.44,-660.63 -2476.02,-663.02 -2459.54,-669.15 -2444.81,-678.74 -2432.53,-691.33 -2423.32,-706.29 -2417.6,-722.92 -2419.3,-734.14 -2506.48,-1168.5 -2510.53,-1195.71 -2622.16,-2470.29 -1625.39,-2556.67 -1602.3,-2560.99 -1580.49,-2569.72 -1560.82,-2582.54 -1544.02,-2598.95 -1530.76,-2618.32 -1521.53,-2639.91 -1516.7,-2662.89 -1516.44,-2686.37 -1158.25,-2717.41 -1105.99,-2120.69 -1464.18,-2089.64 -1468.51,-2112.73 -1477.27,-2134.53 -1490.11,-2154.2 -1506.54,-2171 -1525.94,-2184.28 -1547.54,-2193.52 -1570.54,-2198.37 -1594.03,-2198.64 -1840.5,-2177.28 -1881.3,-2171.58 -1921.27,-2161.65 -1959.99,-2147.6 -1997.02,-2129.57 -2031.95,-2107.78 -2064.42,-2082.45 -2094.05,-2053.87 -2120.53,-2022.35 -2143.57,-1988.22 -2162.91,-1951.88 -2178.34,-1913.71 -2189.7,-1874.14 -2196.85,-1833.59 -2199.72,-1792.51 -2198.28,-1751.36 -2152.65,-1230.34 -2151.81,-1223.19 -2143.49,-1205.12 -2130.96,-1189.66 -2115,-1177.77 -2096.6,-1170.19 -2060.46,-1166.05 -1151.28,-1200.82 -1137.23,-841.71 -1960.28,-810.23 -1988.93,-805.62 -2015.63,-794.26 -2030.01,-783.64 -2041.66,-770.09 -2050,-754.29 -2054.62,-737.02 -2055.28,-719.16 -2054.94,-710.15 -2052.5,-663.22 -2045.18,-616.8 -2033.08,-571.39 -2016.33,-527.47 -1995.1,-485.53 -1973.9,-443.67 -1957.16,-399.84 -1945.06,-354.51 -1937.74,-308.18 -1935.25,-261.34 -1934.92,98.04 -1934.92,294.58 -1932.65,317.61 -1925.93,339.75 -1915.02,360.17 -1900.34,378.06 -1882.44,392.75 -1862.03,403.68 -1839.88,410.41 -1816.84,412.7 -1802.71,411.86 -1762.53,404.93 -1723.3,393.88 -1685.42,378.83 -1649.31,359.95 -1615.35,337.43 -1583.9,311.52 -1555.31,282.49 -1529.87,250.66 -1507.87,216.37 -1489.54,179.99 -1475.07,141.9 -1464.63,102.52 -1458.32,62.27 -1456.2,21.57 -1456.2,-180.9 -373.93,-180 -345.92,-181.98 -318.48,-187.92 -292.17,-197.71 -267.53,-211.14 -245.05,-227.94 -225.2,-247.77 -208.37,-270.22 -194.91,-294.84 -185.1,-321.13 -179.13,-348.55 -177.12,-376.54 -177.12,-754.6 -179.19,-783.01 -185.33,-810.82 -195.43,-837.46 -209.27,-862.37 -226.56,-885.02 -246.94,-904.94 -269.99,-921.71 -295.21,-934.98 -295.21,-1289.05 295.21,-1288.56 295.21,-934.49 269.98,-921.26 246.94,-904.53 226.56,-884.64 209.27,-862.02 195.43,-837.14 185.33,-810.51 179.19,-782.71 177.12,-754.31 177.12,-376.25 179.13,-348.25 185.1,-320.82 194.91,-294.52 208.37,-269.87 225.19,-247.39 245.05,-227.53 267.53,-210.69 292.17,-197.22 318.48,-187.39 345.92,-181.4 373.93,-179.38 1456.2,-178.48 1456.2,24 1458.32,64.69 1464.63,104.96 1475.07,144.36 1489.54,182.47 1507.87,218.88 1529.87,253.21 1555.3,285.08 1583.9,314.16 1615.34,340.12 1649.31,362.69 1685.42,381.64 1723.3,396.75 1762.53,407.86 1802.7,414.86 1824.85,415.46 1846.71,411.91 1867.52,404.34 1886.55,393.02 1903.12,378.35 1916.66,360.83 1926.68,341.1 1932.84,319.84 1934.92,297.8 1934.92,101.26 1935.25,-258.12 1937.73,-304.95 1945.06,-351.27 1957.16,-396.58 1973.9,-440.38 1995.1,-482.21 2016.33,-524.12 2033.08,-568 2045.18,-613.4 2052.49,-659.81 2054.94,-706.73 2055.28,-715.74 2054.62,-733.6 2050,-750.88 2041.66,-766.69 2030,-780.26 2015.63,-790.9 1988.93,-802.31 1960.28,-806.97 1137.23,-839.82 1151.27,-1198.91 2060.46,-1162.62 2065.14,-1162.52 2096.6,-1166.7 2115,-1174.25 2130.96,-1186.11 2143.48,-1201.55 2151.8,-1219.61 2152.65,-1226.76 2222.15,-2020.25 2221.9,-2043.74 2217.07,-2066.72 2207.84,-2088.33 2194.57,-2107.72 2177.78,-2124.16 2158.1,-2137.01 2136.3,-2145.78 2113.21,-2150.13 1594.03,-2195.99 1570.54,-2195.75 1547.54,-2190.94 1525.93,-2181.74 1506.54,-2168.49 1490.11,-2151.72 1477.27,-2132.07 1468.51,-2110.28 1464.18,-2087.21 1105.99,-2118.85 1158.25,-2715.48 1516.44,-2683.84 1516.7,-2660.36 1521.53,-2637.38 1530.76,-2615.77 1544.02,-2596.38 1560.81,-2579.94 1580.49,-2567.09 1602.29,-2558.32 1625.39,-2553.97 2622.16,-2465.92 2510.53,-1191.54 2506.48,-1164.33 2419.3,-730.11 2417.6,-718.89 2423.32,-702.26 2432.53,-687.28 2444.81,-674.68 2459.54,-665.06 2476.02,-658.89 2493.44,-656.48 2496.51,-656.44 2676.63,-656.12 2676.74,-656.12 2699.41,-658.26 2721.26,-664.65 2741.5,-675.06 2759.4,-689.1 2773.63,-702.64 2799.85,-727.63 3191.53,-1104.04 3440.85,-844.88 3051.64,-470.85 3025.43,-445.86 2868.3,-296.41 2654.41,-296.78 2654.3,-296.78 2630.93,-294.5 2608.46,-287.71 2587.75,-276.67 2569.59,-261.81 2554.69,-243.68 2543.6,-223 2536.77,-200.55 2534.45,-177.2 2534.19,102.32 2534.19,300.28 2536.46,323.3 2543.18,345.45 2554.09,365.86 2568.78,383.76 2586.67,398.45 2607.08,409.38 2629.24,416.11 2652.27,418.4 2907.17,418.61 2944.1,416.47 2980.52,410.01 3015.92,399.33 3049.83,384.58 3100.44,361.84 3152.96,343.95 3206.93,331.08 3261.88,323.32 3317.32,320.76 3372.76,323.42 3427.71,331.26 3481.68,344.23 3534.2,362.2 3584.81,385.02 3618.69,399.83 3654.08,410.56 3690.47,417.08 3727.38,419.29 3750.42,417.04 3772.57,410.35 3792.98,399.46 3810.88,384.79 3825.56,366.92 3836.48,346.53 3843.19,324.39 3845.46,301.37 3845.46,252.46 3843.16,229.1 3836.34,206.64 3825.28,185.93 3810.39,167.77 3792.24,152.86 3771.54,141.76 3749.08,134.92 3725.71,132.58 3725.71,-226.8 4324.98,-226.3 4324.98,133.08 4324.87,133.08 4301.49,135.36 4279,142.16 4258.28,153.21 4240.12,168.1 4225.21,186.24 4214.14,206.94 4207.32,229.41 4205.02,252.78 4205.04,419.7 4207.34,443.07 4214.16,465.55 4225.24,486.27 4240.15,504.43 4258.31,519.34 4279.03,530.43 4301.51,537.26 4324.89,539.58 4365.68,536.96 4405.96,530.13 4445.32,519.16 4483.33,504.17 4519.57,485.32 4553.66,462.81 4585.23,436.89 4613.93,407.83 4639.46,375.95 4661.55,341.6 4679.95,305.14 4694.46,266.97 4710.68,223.58 4730.85,181.89 4754.79,142.24 4782.3,104.98 4813.14,70.43 4847.06,38.88 4883.75,10.6 4922.9,-14.15 4964.18,-35.19 5007.23,-52.31 5029.6,-62.71 5049.36,-77.48 5065.67,-95.97 5077.84,-117.42 5085.36,-140.91 5087.9,-165.45 5087.9,-545.9 5085.6,-569.28 5078.78,-591.75 5067.7,-612.47 5052.8,-630.64 5034.63,-645.55 5013.91,-656.64 4991.43,-663.47 4968.04,-665.8 4968.04,-1025.17 5567.32,-1024.67 5567.32,-665.3 5543.93,-663.01 5521.45,-656.22 5500.73,-645.16 5482.57,-630.28 5467.66,-612.14 5456.58,-591.44 5449.76,-568.97 5447.46,-545.6 5447.46,-199.22 5449.76,-175.85 5456.58,-153.37 5467.66,-132.65 5482.57,-114.49 5500.73,-99.57 5521.45,-88.49 5543.93,-81.65 5567.32,-79.33 5989.84,-78.98 5989.84,280.4 5170.84,279.72 5146.38,281.84 5122.67,288.17 5100.42,298.52 5080.31,312.58 5062.95,329.92 5048.86,350 5038.49,372.24 5032.13,395.93 5029.99,420.38 5029.99,1019.34 5032.13,1043.79 5038.49,1067.49 5048.86,1089.74 5062.95,1109.86 5080.31,1127.22 5100.42,1141.31 5122.67,1151.7 5146.38,1158.07 5170.84,1160.23 5989.84,1160.91 5989.84,1520.29 5567.32,1519.94 5543.93,1522.22 5521.45,1529.02 5500.73,1540.07 5482.57,1554.96 5467.66,1573.1 5456.58,1593.8 5449.76,1616.26 5447.46,1639.63 5447.46,1986.02 5449.76,2009.39 5456.58,2031.87 5467.66,2052.59 5482.57,2070.75 5500.73,2085.66 5521.45,2096.75 5543.93,2103.59 5567.32,2105.91 5567.32,2465.29 4968.04,2464.79 4968.04,2105.41 4991.43,2103.13 5013.91,2096.33 5034.63,2085.28 5052.8,2070.39 5067.7,2052.25 5078.78,2031.55 5085.6,2009.08 5087.9,1985.72 5087.9,1605.26 5085.36,1580.72 5077.84,1557.22 5065.67,1535.75 5049.36,1517.22 5029.6,1502.43 5007.23,1491.99 4964.18,1474.79 4922.9,1453.69 4883.75,1428.87 4847.06,1400.53 4813.14,1368.92 4782.3,1334.32 4754.79,1297.02 4730.85,1257.33 4710.68,1215.6 4694.46,1172.19 4679.95,1134 4661.55,1097.51 4639.47,1063.12 4613.94,1031.21 4585.24,1002.11 4553.68,976.13 4519.6,953.57 4483.37,934.66 4445.37,919.6 4406.01,908.56 4365.73,901.65 4324.95,898.96 4301.57,901.24 4279.08,908.04 4258.36,919.1 4240.2,933.98 4225.29,952.12 4214.22,972.83 4207.4,995.3 4205.1,1018.67 4205.12,1185.59 4207.42,1208.96 4214.24,1231.43 4225.32,1252.15 4240.23,1270.32 4258.39,1285.23 4279.11,1296.31 4301.59,1303.15 4324.97,1305.47 ; -4324.98,1298.27 -4324.97,1298.27 ; -4324.98,1298.27 -4324.98,1657.65 -3725.71,1658.15 -3725.71,1298.77 -3749.1,1296.44 -3771.58,1289.61 -3792.3,1278.52 -3810.46,1263.6 -3825.36,1245.44 -3836.44,1224.71 -3843.26,1202.24 -3845.56,1178.86 -3845.55,1129.96 -3843.28,1106.94 -3836.56,1084.81 -3825.65,1064.42 -3810.96,1046.55 -3793.07,1031.88 -3772.65,1021 -3750.5,1014.3 -3727.47,1012.05 -3690.54,1014.25 -3654.12,1020.77 -3618.71,1031.51 -3584.81,1046.32 -3538.89,1067.27 -3491.35,1084.22 -3442.54,1097.05 -3392.82,1105.67 -3342.55,1110.02 -3292.09,1110.06 -3241.82,1105.8 -3192.09,1097.26 -3143.29,1084.51 -3095.75,1067.64 -3049.83,1046.77 -3015.93,1032.01 -2980.52,1021.33 -2944.1,1014.88 -2907.17,1012.73 -2652.27,1012.95 -2629.24,1015.23 -2607.09,1021.97 -2586.67,1032.89 -2568.78,1047.58 -2554.09,1065.48 -2543.18,1085.89 -2536.46,1108.04 -2534.19,1131.07 -2534.19,1329.03 -2534.45,1608.54 -2536.77,1631.91 -2543.62,1654.37 -2554.71,1675.06 -2569.63,1693.19 -2587.81,1708.05 -2608.54,1719.09 -2631.03,1725.87 -2654.42,1728.13 -2868.3,1727.75 -3025.43,1877.2 -3051.64,1902.19 -3440.85,2276.23 -3191.53,2535.38 -2799.85,2158.98 -2773.64,2133.98 -2759.4,2120.45 -2741.48,2106.39 -2721.21,2095.98 -2699.33,2089.59 -2676.63,2087.46 -2496.51,2087.78 -2493.44,2087.83 -2476.02,2090.24 -2459.54,2096.4 -2444.81,2106.02 -2432.53,2118.62 -2423.32,2133.61 -2417.6,2150.24 -2419.3,2161.45 -2506.48,2595.68 -2510.53,2622.88 -2622.16,3897.27 -1625.39,3985.31 -1602.3,3989.66 -1580.49,3998.43 -1560.82,4011.28 -1544.02,4027.72 -1530.76,4047.12 -1521.53,4068.72 -1516.7,4091.71 -1516.44,4115.19 -1158.25,4146.83 -1105.99,3550.19 -1464.18,3518.55 -1468.15,3540.37 -1476.09,3561.08 -1487.7,3579.97 -1502.61,3596.39 -1520.29,3609.79 -1540.14,3619.69 -1561.48,3625.76 -1583.58,3627.8 -1594.03,3627.33 -1840.5,3605.56 -1881.3,3599.79 -1921.27,3589.8 -1959.99,3575.68 -1997.02,3557.59 -2031.95,3535.74 -2064.42,3510.36 -2094.05,3481.73 -2120.53,3450.16 -2143.57,3416 -2162.91,3379.63 -2178.34,3341.43 -2189.7,3301.84 -2196.85,3261.28 -2199.72,3220.2 -2198.28,3179.04 -2152.65,2658.11 -2151.81,2650.96 -2143.49,2632.9 -2130.96,2617.46 -2115,2605.6 -2096.6,2598.04 -2065.14,2593.87 -2060.46,2593.96 -1151.28,2630.25 -1137.23,2271.16 -1960.28,2238.31 -1988.93,2233.65 -2015.63,2222.25 -2030.01,2211.61 -2041.66,2198.04 -2050,2182.22 -2054.62,2164.95 -2055.28,2147.08 -2054.94,2138.07 -2052.5,2091.15 -2045.18,2044.74 -2033.08,1999.35 -2016.33,1955.46 -1995.1,1913.56 -1973.9,1871.73 -1957.16,1827.92 -1945.06,1782.62 -1937.74,1736.3 -1935.25,1689.46 -1934.92,1330.08 -1934.92,1011.77 -1932.65,988.75 -1925.93,966.62 -1915.02,946.22 -1900.34,928.35 -1882.44,913.68 -1862.03,902.8 -1839.88,896.1 -1816.84,893.85 -976.79,894.55 -976.79,535.17 -1000.17,532.85 -1022.65,526.01 -1043.38,514.93 -1061.54,500.01 -1076.44,481.85 -1087.52,461.13 -1094.34,438.65 -1096.64,415.28 -1096.64,298.57 -1094.34,275.2 -1087.52,252.73 -1076.44,232.03 -1061.54,213.89 -1043.38,199.01 -1022.65,187.96 -1000.17,181.16 -976.79,178.88 -649.46,179.15 -621.45,181.17 -594.01,187.16 -567.7,196.99 -543.05,210.46 -520.58,227.3 -500.72,247.16 -483.89,269.64 -470.44,294.29 -460.62,320.59 -454.65,348.02 -452.65,376.02 -452.65,3327.47 452.65,3328.22 452.65,376.77 454.65,348.78 460.62,321.36 470.44,295.07 483.89,270.45 500.72,248 520.58,228.17 543.05,211.37 567.7,197.94 594.01,188.15 621.45,182.21 649.45,180.23 976.79,180.5 1000.17,182.82 1022.65,189.66 1043.37,200.75 1061.54,215.66 1076.44,233.82 1087.52,254.54 1094.34,277.02 1096.64,300.39 1096.64,417.1 1094.34,440.47 1087.52,462.94 1076.44,483.64 1061.54,501.78 1043.37,516.66 1022.65,527.72 1000.17,534.51 976.79,536.8 976.79,896.17 1816.84,896.87 1839.87,899.16 1862.03,905.89 1882.44,916.82 1900.33,931.51 1915.02,949.41 1925.93,969.82 1932.65,991.97 1934.92,1014.99 1934.92,1333.3 1935.25,1692.68 1937.73,1739.52 1945.06,1785.85 1957.16,1831.18 1973.9,1875.01 1995.1,1916.88 2016.33,1958.82 2033.08,2002.73 2045.18,2048.15 2052.49,2094.57 2054.94,2141.49 2055.28,2150.5 2054.62,2168.37 2050,2185.63 2041.66,2201.44 2030,2214.98 2015.63,2225.6 1988.93,2236.96 1960.28,2241.57 1137.23,2273.05 1151.27,2632.17 2060.46,2597.39 2065.14,2597.31 2096.6,2601.53 2115,2609.12 2130.96,2621.01 2143.48,2636.47 2151.8,2654.54 2152.65,2661.69 2222.15,3455.3 2221.9,3478.78 2217.07,3501.76 2207.84,3523.34 2194.57,3542.72 2177.78,3559.13 2158.1,3571.94 2136.3,3580.68 2113.21,3584.99 1594.03,3629.98 1583.58,3630.43 1561.48,3628.36 1540.14,3622.25 1520.29,3612.32 1502.61,3598.89 1487.7,3582.45 1476.08,3563.54 1468.15,3542.81 1464.18,3520.99 1105.99,3552.03 1158.25,4148.76 1516.44,4117.71 1516.7,4094.23 1521.53,4071.25 1530.76,4049.66 1544.02,4030.29 1560.81,4013.88 1580.49,4001.06 1602.29,3992.33 1625.39,3988.02 2622.16,3901.63 2510.53,2627.06 2506.48,2599.85 2419.3,2165.48 2417.6,2154.26 2423.32,2137.64 2432.53,2122.67 2444.81,2110.09 2459.54,2100.5 2476.02,2094.36 2493.44,2091.98 2496.51,2091.94 2676.63,2091.92 2699.32,2094.08 2721.2,2100.51 2741.48,2110.95 2759.4,2125.04 2773.63,2138.6 2799.85,2163.64 3191.53,2540.69 3440.85,2281.95 3051.64,1907.27 3025.43,1882.24 2868.3,1732.52 2654.41,1732.54 2631.03,1730.24 2608.54,1723.43 2587.81,1712.36 2569.63,1697.47 2554.71,1679.31 2543.61,1658.6 2536.77,1636.13 2534.45,1612.76 2534.19,1333.25 2534.19,1135.28 2536.46,1112.26 2543.18,1090.13 2554.09,1069.73 2568.78,1051.86 2586.67,1037.2 2607.08,1026.31 2629.24,1019.61 2652.27,1017.36 2907.17,1017.57 2944.1,1019.78 2980.52,1026.29 3015.92,1037.03 3049.83,1051.84 3095.75,1072.79 3143.28,1089.74 3192.09,1102.57 3241.82,1111.2 3292.09,1115.54 3342.55,1115.59 3392.82,1111.32 3442.54,1102.78 3491.35,1090.03 3538.89,1073.16 3584.81,1052.29 3618.71,1037.53 3654.12,1026.85 3690.54,1020.4 3727.47,1018.26 3750.5,1020.54 3772.65,1027.28 3793.07,1038.2 3810.96,1052.89 3825.64,1070.78 3836.56,1091.2 3843.28,1113.34 3845.55,1136.36 3845.56,1185.26 3843.25,1208.63 3836.44,1231.1 3825.36,1251.8 3810.46,1269.94 3792.3,1284.83 3771.58,1295.88 3749.09,1302.68 3725.71,1304.97 3725.71,1664.35 4324.98,1664.84 4324.98,1305.47 ; 4324.97,1305.47 4324.98,1305.47

## Other copper
Bottom Layer:
  region net VCC: -348.43,3185.04 -438.98,3185.04 -438.98,3112.2 -426.18,3099.41 -360.24,3099.41 -348.43,3111.22

## Silkscreen, mask and mechanical layers (free items; w line width, h text height)
Bottom Overlay:
  text "OculusVR" at 232.28,2691.93 h60
  text "LEDFLX001" at 232.28,2589.57 h60
Mechanical 1:
  drawing of 1106 lines, arcs and shapes, not listed